# Altium PCB Battery_Module.PcbDoc
Units mm, origin at the board's own origin, x right, y up, seen from the top; angles counter-clockwise.
Board outline 80.25 x 40 mm, 2 copper layers (Top Layer, Bottom Layer); 27 components, 15 nets, 103 pads, 93 vias.
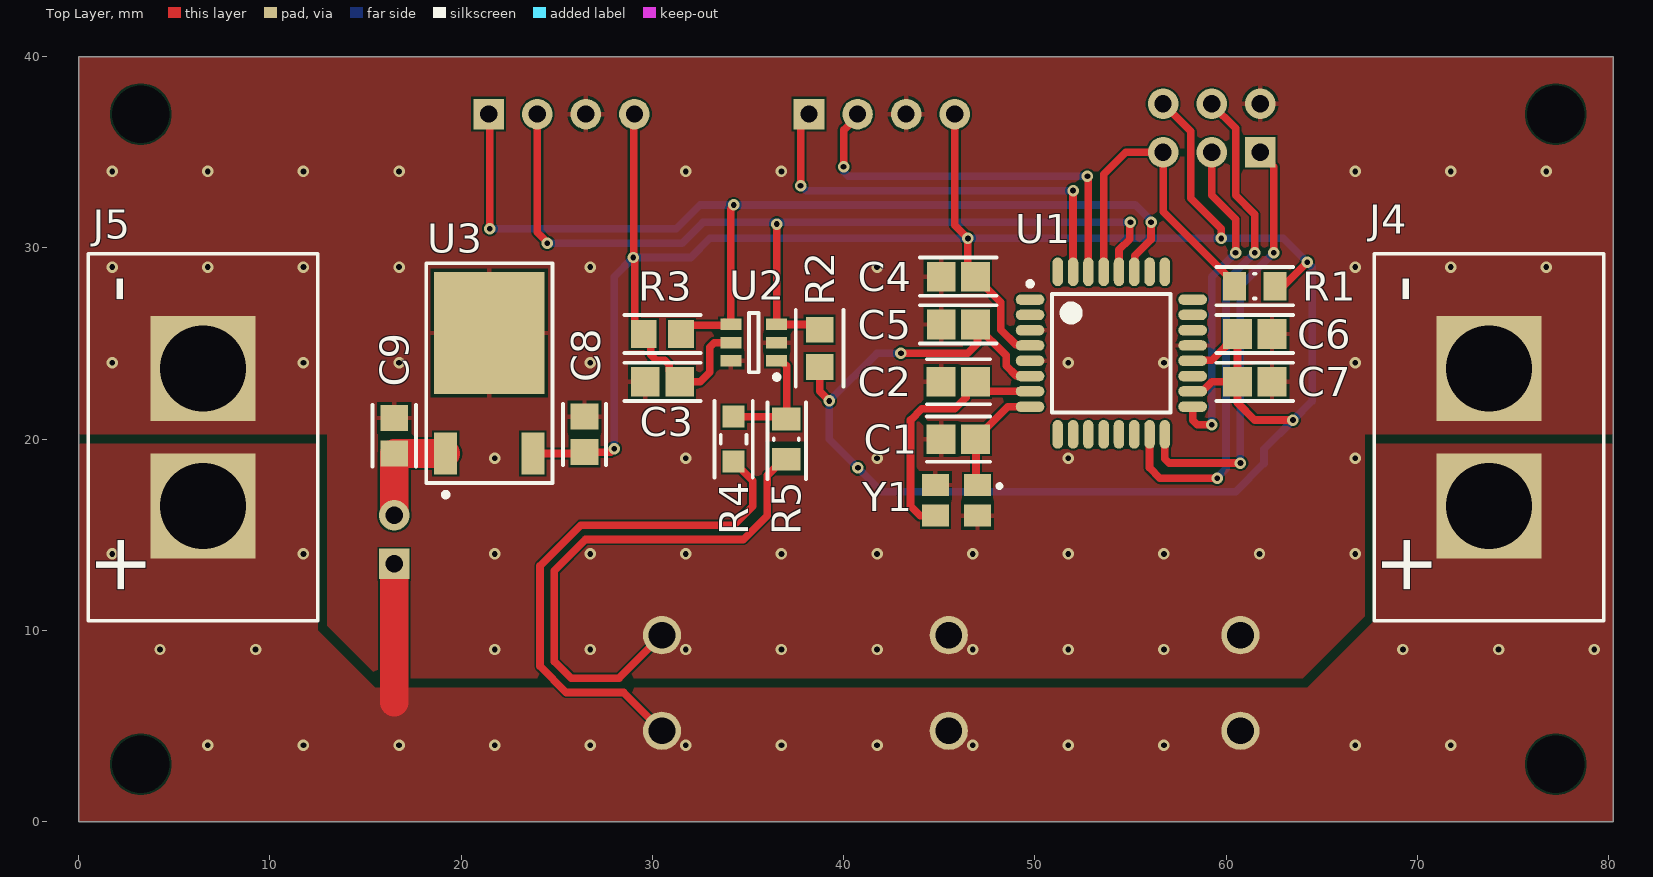
[diagram p0: Top Layer view]
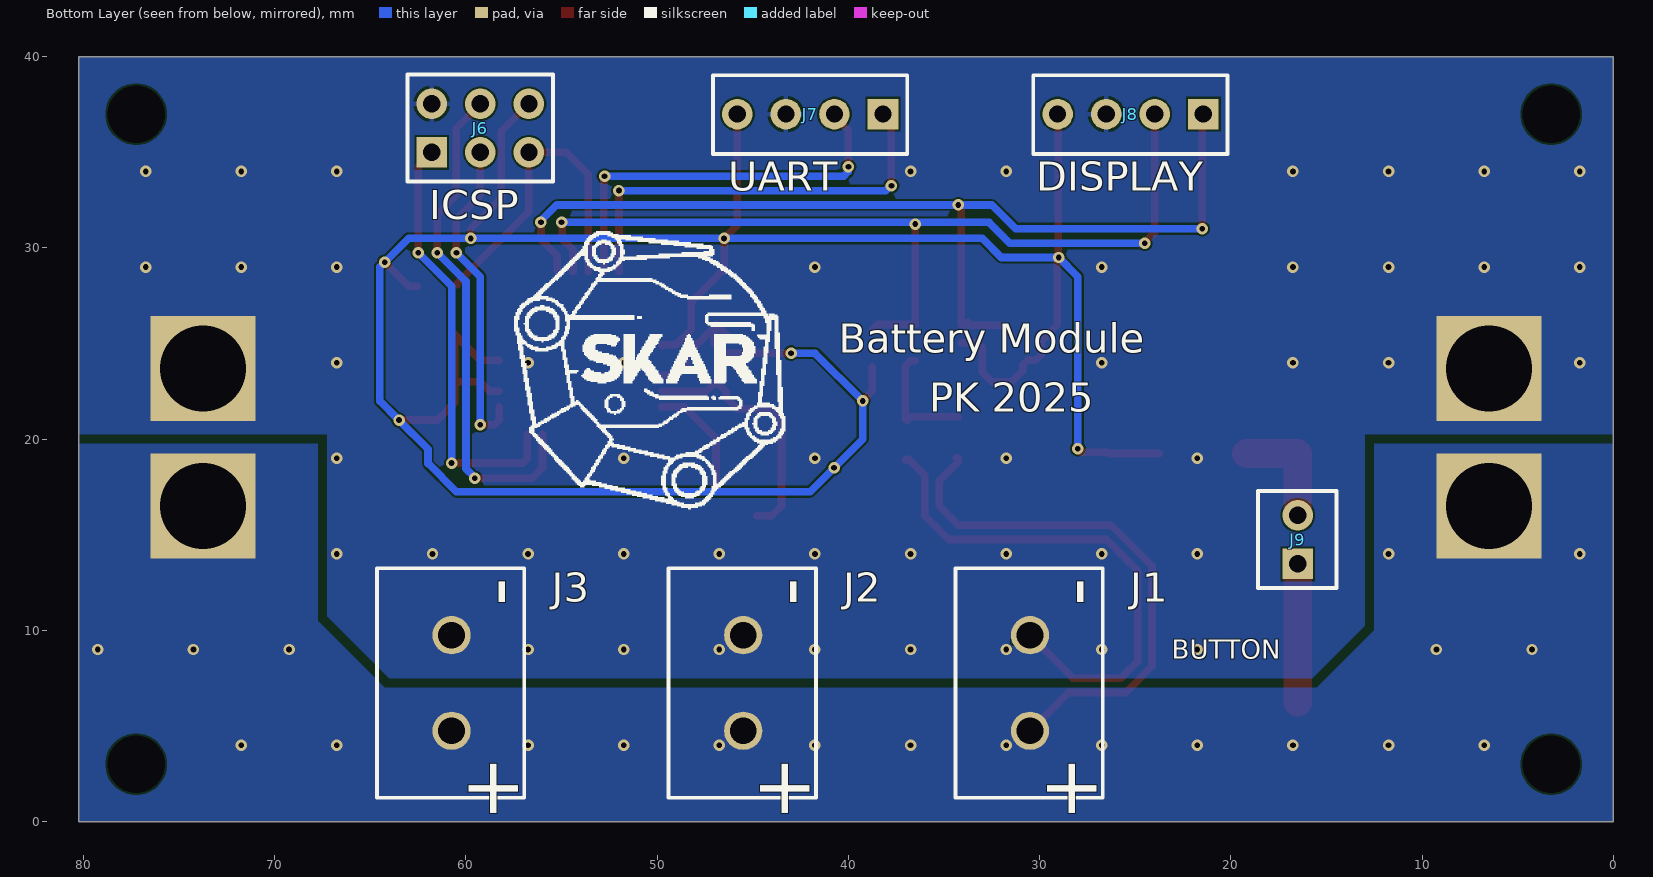
[diagram p1: Bottom Layer view, seen from below]

## Layer stack, top to bottom
Top Solder: solder mask 0.0102, Solder Resist, Dk 3.5
Top Layer: signal copper 0.0356
Dielectric 1: dielectric 0.32, FR-4, Dk 4.8
Bottom Layer: signal copper 0.0356
Bottom Solder: solder mask 0.0102, Solder Resist, Dk 3.5

## Board outline
0,0 80.25,0 80.25,40 0,40

## Design rules (kind name [scope] priority, off if disabled: settings)
Clearance Clearance_1 [All] p1: gap=0.1 ignorepadtopadclearanceinfootprint=TRUE
Clearance [All] p2: gap=0.1 ignorepadtopadclearanceinfootprint=TRUE
HoleSize [All] p1: absolutevalues=TRUE maxlimit=5 minlimit=0.025 maxpercent=80.000 minpercent=20.000
MinimumSolderMaskSliver [All] p1: minsoldermaskwidth=0.04
PolygonConnect PolygonConnectPWR [All vs HasFootprint('XT60_FEMALE_PANEL') OR HasFootprint('Phoenix')] p1: connectstyle=Direct reliefconductorwidth=0.254 reliefentries=4 polygonreliefangle="90 Angle" airgapwidth=0.254
PolygonConnect [All] p2: thpad.connectstyle=Relief thpad.reliefconductorwidth=0.254 thpad.reliefentries=4 thpad.polygonreliefangle="90 Angle" thpad.airgapwidth=0.15 smdpad.connectstyle=Relief smdpad.reliefconductorwidth=0.254 smdpad.reliefentries=4 smdpad.polygonreliefangle="90 Angle" smdpad.airgapwidth=0.15 via.connectstyle=Direct via.reliefconductorwidth=0.254 via.reliefentries=4 via.polygonreliefangle="90 Angle" via.airgapwidth=0.15
RoutingVias [All] p1: holewidth=0.2 width=0.4 viastyle="Through Hole" minholewidth=0.2 minwidth=0.4 maxholewidth=0.711 maxwidth=1.27
SilkToSilkClearance [All] p1: silktosilkclearance=0
SilkToSolderMaskClearance [IsPad] p1: minsilkscreentomaskgap=0.015 clearancetoexposedcopper=TRUE
SolderMaskExpansion [All] p1: expansion=0.04 istentingtop=FALSE
SupplyNets "Schematic Supply Nets_2" [InNet('VIN')] p1: voltage=0.000
SupplyNets "Schematic Supply Nets_1" [InNet('+5V')] p2: voltage=0.000
SupplyNets "Schematic Supply Nets" [InNet('GND')] p3: voltage=0.000
Width Width_1 [All] p1: maxlimit=3 minlimit=0.254 preferedwidth=0.4
Width [All] p2: maxlimit=0.625 minlimit=0.254 preferedwidth=0.4 minimp=50.000000 maximp=50.000000 favimp=50.000000
26 further rules are at their usual default settings.

## Components (designator, comment, footprint, x,y, rotation, side; value= is the part's Value field where it differs from the comment)
C1 "16pF" FP-C0805C-DN-IPC_A 46,20 r0 top value="16 pF"
C2 "16pF" FP-C0805C-DN-IPC_A 46,23 r0 top value="16 pF"
C3 "100nF" CAPC2013X140X50ML20T25 30.525,23 r0 top
C4 "100nF" CAPC2013X140X50ML20T25 46,28.5 r180 top
C5 "100nF" CAPC2013X140X50ML20T25 46,26 r180 top
C6 "100nF" CAPC2013X140X50ML20T25 61.5,25.5 r0 top
C7 "100nF" CAPC2013X140X50ML20T25 61.5,23 r0 top
C8 "10uF" FP-GRM21B-0_1-IPC_A 26.45,20.25 r90 top
C9 "10uF" FP-GRM21B-0_1-IPC_A 16.5,20.177 r90 top
J1 "Phoenix" Phoenix 30.5,4.75 r270 bottom
J2 "Phoenix" Phoenix 45.5,4.75 r270 bottom
J3 "Phoenix" Phoenix 60.75,4.75 r270 bottom
J4 "XT60" XT60_FEMALE_PANEL 73.75,16.5 r90 top
J5 "XT60" XT60_FEMALE_PANEL 6.5,16.5 r90 top
J6 "ICSP" "HEADER2X3 - DUPLICATE" 59.25,36.27 r90 bottom
J7 "UART" HEADER1X4 42,37 r270 bottom
J8 "DISPLAY" HEADER1X4 25.25,37 r270 bottom
J9 "BUTTON" HEADER1X2 16.5,14.75 r0 bottom
R1 "Resistor 10k +/-1% 0805 125 mW" RESC2013X50X35ML15T15 61.5,28 r0 top value=10k
R2 "Resistor 4k7 +/-1% 0805 125 mW" RESC2013X70X40ML20T20 38.75,24.75 r270 top value=4.7k
R3 "Resistor 4k7 +/-1% 0805 125 mW" RESC2013X70X40ML20T20 30.525,25.5 r180 top value=4.7k
R4 "150k" FP-ERA6A-MFG 34.25,20 r270 top
R5 "Resistor 10k +/-1% 0805 125 mW" RESC2013X50X35ML15T15 37,20 r270 top value=10k
U1 "ATMEGA328P-AU" ATMEGA328P-AU 54,24.5 r0 top
U2 "ADS1110A0IDBVT" TI-DBV6_N 35.3,25.05 r180 top
U3 "TLE7274-2D" TO228P998X235-3N-2-V 21.47,22.4 r90 top
Y1 "16MHz" WE-XTAL_CFPX-180 45.9,16.8 r180 top

## Footprints (in the part's own frame and the unit in brackets; to place one, negate y for a bottom-side part, rotate by r counter-clockwise, add the part's x,y. Pads: shape width x height; smd on the part's side, far side on the other; paste and mask are expansions set on the pad)
ATMEGA328P-AU [mm] "TQFP, 32-Leads, Body 7,00x7,00mm, Pitch 0,80mm, IPC Medium Density"
  oval 1.5x0.55 smd: 1(-4.25,2.8) 2(-4.25,2) 3(-4.25,1.2) 4(-4.25,0.4) 5(-4.25,-0.4) 6(-4.25,-1.2) 7(-4.25,-2) 8(-4.25,-2.8) 17(4.25,-2.8) 18(4.25,-2) 19(4.25,-1.2) 20(4.25,-0.4) 21(4.25,0.4) 22(4.25,1.2) 23(4.25,2) 24(4.25,2.8)
  oval 0.55x1.5 smd: 9(-2.8,-4.25) 10(-2,-4.25) 11(-1.2,-4.25) 12(-0.4,-4.25) 13(0.4,-4.25) 14(1.2,-4.25) 15(2,-4.25) 16(2.8,-4.25) 25(2.8,4.25) 26(2,4.25) 27(1.2,4.25) 28(0.4,4.25) 29(-0.4,4.25) 30(-1.2,4.25) 31(-2,4.25) 32(-2.8,4.25)
  silkscreen extent -4.37,-3.1 3.1,3.75, body extent -4.5,-4.5 4.5,4.5, height 1.2
CAPC2013X140X50ML20T25 [mm] "Chip Capacitor, 2-Leads, Body 2.00x1.25mm, IPC Low Density"
  rect 1.5x1.55 smd: 1(-0.9,0) 2(0.9,0)
  body extent -1.1,-0.72 1.1,0.72, height 1.4
FP-C0805C-DN-IPC_A [mm]
  rect 1.505x1.556 smd paste+0 mask+0: 1(-0.901,0) 2(0.901,0)
  silkscreen extent -1.65,-1.18 1.65,1.18, body extent -2.15,-1.28 2.15,1.28, height 0.25
FP-ERA6A-MFG [mm]
  rect 1.15x1.15 smd paste+0 mask+0: 1(-1.175,0) 2(1.175,0)
  silkscreen extent -0.23,-0.67 0.23,0.67, body extent -1.85,-0.77 1.85,0.77, height 0.25
FP-GRM21B-0_1-IPC_A [mm]
  rect 1.358x1.462 smd paste+0 mask+0: 1(-0.927,0) 2(0.927,0)
  silkscreen extent -1.61,-1.13 1.61,1.13, body extent -2.11,-1.23 2.11,1.23, height 0.25
HEADER1X2 [mm]
  rect 1.6x1.6 hole 0.9: 1(0,1.27)
  round 1.6 hole 0.9: 2(0,-1.27)
  silkscreen extent -2.03,-2.54 2.08,2.54, body extent -1.27,-2.54 1.27,2.54, height 9.5
HEADER1X4 [mm]
  rect 1.6x1.6 hole 0.9: 1(0,3.81)
  round 1.6 hole 0.9: 2(0,1.27) 3(0,-1.27) 4(0,-3.81)
  silkscreen extent -2.03,-5.08 2.08,5.08, body extent -1.27,-5.08 1.27,5.08, height 9.5
"HEADER2X3 - DUPLICATE" [mm]
  rect 1.6x1.6 hole 0.9: 1(-1.27,2.54)
  round 1.6 hole 0.9: 2(-1.27,0) 3(-1.27,-2.54) 4(1.27,-2.54) 5(1.27,0) 6(1.27,2.54)
  silkscreen extent -2.79,-3.81 2.79,3.81, body extent -2.54,-3.81 2.54,3.81, height 9.5
Phoenix [mm]
  round 2 hole 1.4 paste-2539.97: 1(0,0) 2(-5,0)
  silkscreen extent -8.5,-3.9 3.5,3.8, body extent -8.5,-3.87 3.5,4.7, height 12.1
RESC2013X50X35ML15T15 [mm] "Chip Resistor, 2-Leads, Body 2.2x1.4mm, IPC Low Density"
  rect 1.2x1.5 smd: 1(-1.05,0) 2(1.05,0)
  silkscreen extent -0.05,-0.65 0.05,0.65, body extent -1.1,-0.7 1.1,0.7, height 0.5
RESC2013X70X40ML20T20 [mm] "Chip Resistor, 2-Leads, Body 2.2x1.35mm, IPC Low Density"
  rect 1.35x1.45 smd: 1(-0.975,0) 2(0.975,0)
  body extent -1.1,-0.67 1.1,0.67, height 0.7
TI-DBV6_N [mm] "SOT23, 6-Leads, Body 2.9x1.6mm, Pitch 0.95mm, IPC Medium Density"
  rect 1.1x0.6 smd: 1(-1.2,0.95) 2(-1.2,0) 3(-1.2,-0.95) 4(1.2,-0.95) 5(1.2,0) 6(1.2,0.95)
  silkscreen extent -1.33,-1.55 0.25,1.92, body extent -0.87,-1.52 0.87,1.53, height 1.45
TO228P998X235-3N-2-V [mm] "TO,2.28mm pitch;2 pin,9.98mm L X 6.12mm W X 2.35mm H body"
  rect 2.2x1.2 smd paste+0 mask+0: 1(-3.15,2.28) 3(-3.15,-2.28)
  rect 6.4x5.8 smd paste+0 mask+0: 2(3.15,0)
  silkscreen extent -5.42,-3.3 6.8,3.3, body extent -3.94,-3.25 6.04,3.25, height 2.36
WE-XTAL_CFPX-180 [mm] "Quartz Crystal, size CFPX-180, body 3.4x2.7mm"
  rect 1.4x1.15 smd: 1(-1.1,-0.8) 2(1.1,-0.8) 3(1.1,0.8) 4(-1.1,0.8)
  silkscreen extent -2.35,-0.85 -2.15,-0.65, body extent -1.7,-1.35 1.7,1.35, height 0.65
XT60_FEMALE_PANEL [mm]
  rect 5.5x5.5 hole 4.5 paste-2539.97: 1(0,0) 2(7.2,0)
  silkscreen extent -6,-6 13.2,6, body extent -13.45,-7.88 20.55,7.88, height 15.5

## Part data
C1 C2: library part CMP-03020-014624-1, "C0805C160J5GACTU / CAP CER 16PF 50V NP0 0805", Capacitance="16 pF", Manufacturer=KEMET, Manufacturer Part Number=C0805C160J5GACTU, Package=C0805C-DN, Temperature="-55°C to +125°C", Temperature Characteristic=C0G, Temperature Coefficient=30ppm/°C, Temperature Range High=+125°C, Temperature Range Low=-55°C, Tolerance=0.05, Voltage Rating="50 V", Automotive=No, Category=Cap, ComponentLink2Description=Datasheet, ComponentLink2URL=https://content.kemet.com/datasheets/KEM_C1003_C0G_SMD.pdf, Device Class L1="Passive Components", Device Class L2=Capacitors, Device Class L3="Ceramic Capacitors", Digikey Description="CAP CER 16PF 50V NP0 0805", Height=0.88mm, Ipc Land Pattern Name=CAPC200125X78, Lead Free=Yes, Material=Ceramic, Mouser Description="Capacitor, Ceramic, 16Pf, 50Vdc, 5-% Tol, 5+% Tol, C0g-Tc Code, -30, 30Ppm-Tc Rohs Compliant: Yes", Octopart=https://octopart.com/c0805c160j5gactu-kemet-11800741, RoHS=TRUE
C3 C4 C5 C6 C7: library part CMP-2007-04784-1, Manufacturer="AVX Interconnect / Elco", Part Number=08055F104KAT2A
C8 C9: library part CMP-2007-03462-2, "Chip Multilayer Ceramic Capacitors for General Purpose, 0805, 10uF, X6S, 22%, 10%, 10V", Case Code (Imperial)=0805, Case Code (Metric)=2012, Dielectric=X6S, Max Operating Temperature=105°C, Min Operating Temperature=-55°C, Package Quantity=3000, Tolerance=10%, Voltage=10V, Capacitance=10uF, Case/Package=0805, Depth=1.25mm, Height=1.25mm, Lead Free="Lead Free", Length=2mm, Material=Ceramic, Mount="Surface Mount", Packaging="Tape and Reel", Radiation Hardening=No, REACH SVHC="No SVHC", Termination=SMD/SMT, Thickness=0.053inch, Voltage Rating=10V, Voltage Rating (DC)=10V, Width=1.25mm
J1 J2 J3 J4 J5 J9: library part Connector_2
J6: library part "Header 2x3"
J8: library part "IIC for Display"
R1 R5: library part CMP-009-00018-5, "Chip Resistor, 10 KOhm, +/- 1%, 125 mW, -55 to 155 degC, 0805 (2012 Metric)", Case/Package=0805, Max Operating Temperature=155°C, Min Operating Temperature=-55°C, Power=125mW, Tolerance=1%, Voltage Rating=150V, Mounting Technology=SM, Pins=2, RoHS Compliant=True
R2 R3: library part CMP-009-00032-5, "Chip Resistor, 4.7 KOhm, +/- 1%, 0.125 W, -55 to 155 degC, 0805 (2012 Metric)", Case/Package=0805, Max Operating Temperature=155°C, Min Operating Temperature=-55°C, Power=125mW, Tolerance=1%, Voltage Rating=150V, Mounting Technology=SM, Pins=2, RoHS Compliant=True
R4: library part CMP-2001-00599-2, "ERA-6AEB154V / RES 150K OHM 0.1% 1/8W 0805", Case Code (Imperial)=0805, Case Code (Metric)=2012, Max Operating Temperature=155°C, Max Power Dissipation=125mW, Min Operating Temperature=-55°C, Package Quantity=5000, Resistance=150kR, Resistance Tolerance=0.1%, Resistor Type="Thin Film", Temperature Coefficient=25ppm/°C, Voltage Rating=100V, Case/Package=0805, Construction=Rectangular, Contact Plating=Tin, Depth=1.25mm, Height=0.5mm, Lead Free="Lead Free", Length=2mm, Military Standard=Not, Mount="Surface Mount", Number of Pins=2, Number of Terminations=2, Packaging="Tape and Reel", Power Rating=125mW, Radiation Hardening=No, REACH SVHC="No SVHC", RoHS Compliant=Yes, Series=ERA-6A, Technology="METAL FILM", Termination=SMD/SMT, Tolerance=0.1%, Voltage Rating (DC)=100V, Width=1.25mm
U1: "8-bit Microcontrollers - MCU 32KB In-system Flash 20MHz 1.8V-5.5V"
U2: library part CMP-0003-00281-2, "16-Bit Delta-Sigma ADC with Internal Reference, PGA and Oscillator, I2C Serial Interface, -40 to 85 degC, 6-pin SOT23 (DBV6), Green (RoHS & no Sb/Br)", Analog Voltage AV/DD(Max)(V)=5.5, Analog Voltage AV/DD(Min)(V)=2.7, Manufacturer="Texas Instruments", # Input Channels=1, Architecture=Delta-Sigma, Code_JEDEC=MO-178, ComponentLink1Description="Manufacturer URL", ComponentLink1URL=http://www.ti.com/, ComponentLink2Description=Datasheet, ComponentLink2URL=http://www.ti.com/general/docs/lit/getliterature.tsp?genericPartNumber=ADS1110&fileType=pdf, ComponentLink3Description="Package Specification", ComponentLink3URL=http://www.ti.com/litv/pdf/mpds026h, DatasheetVersion=SBAS276A, Digital Supply(Max)(V)=5.5, Digital Supply(Min)(V)=2.7, Eco-Plan="Green (RoHS & no Sb/Br)", Interface="Serial I2C", Mounting Technology="Surface Mount", PackageDescription="6-Pin Plastic Small Outline, Body 1.6 x 2.9 mm, Pitch 0.95 mm", PackageReference=DBV6, PackageVersion="4073253-5/K, 03/2006", PartNumber=ADS1110A0IDBVT, Resolution(Bits)=16, Sample Rate (max)(SPS)=240, SubFamily="Precision ADC (<=10MSPS)"
Y1: library part CMP-03913-116876453-1, "830035264 WE-XTAL Quartz Crystal", Max Operating Temperature=60°C, Min Operating Temperature=-10°C, Frequency=16MHz, Height=800µm, Length=3.2mm, NexarPartId=116876453, Width=2.5mm

## Free pads (board coordinates)
  round 0 hole 3 paste-2539.97: 6(3.25,3) 6(3.25,37) 6(77.25,3) 6(77.25,37)

## Via types
v1: diameter 0.6, hole 0.3, Top Layer to Bottom Layer, tented both sides, 93 vias

## Nets (pads, with @x,y where several pads share a name; then routed paths per layer and width w, separated by ;. In a path a pad name is that pad's centre, name@x,y a point inside that pad or via, vN(x,y) a via of type N, cw(c..) or ccw(c..) an arc to the next point about the centre after c; other vN are vias at no path point)
+5V: C3.2 C4.1 C5.1 C6.1 C7.1 C8.1 J6.4 J7.4 J8.4 R1.2 R2.2 R3.2 U1.4 U1.6 U1.18 U1.20 U2.5 U3.3 | length 162.6
  Top Layer w0.4: U3.3 26.377,19.25 C8.1 27.823,19.323 v1(28,19.5) ; J8.4 29.03,36.97 29.03,29.53 v1(29,29.5) 29,29.446 29.075,29.371 29.075,25.975 R3.2 29.918,25.132 29.918,24.419 30.212,24.125 30.641,24.125 30.875,23.891 30.875,23.575 C3.2@31.45,23 ; C3.2@31.5,22.95 C3.2@31.45,23 ; U2.5 33.234,25.05 33,24.816 33,23.5 32.5,23 C3.2@31.45,23 ; R2.2 38.75,22.5 v1(39.25,22) ; v1(43,24.5) 46.5,24.5 47,25 C5.1@47,25.875 ; J7.4 45.81,31.19 v1(46.5,30.5) 46.5,28.9 C4.1 ; C5.1@46.35,25.45 C5.1 47,25.9 C5.1@47,25.875 ; C4.1@46.888,28.487 48.212,27.163 48.212,25.733 49.015,24.929 49.721,24.929 U1.4 ; U1.6 49.721,23.329 49.015,23.329 48.5,23.844 48.5,24.375 C5.1@47,25.875 ; J6.4 58.15,36.1 58.15,32.6 59.75,31 v1(59.75,30.5) ; U1.18 58.766,22.5 59.266,23 C7.1 ; U1.20 58.279,24.129 59.254,24.129 60.6,25.475 C7.1 ; R1.2 63,28 v1(64.25,29.25) ; v1(63.5,21) 61.5,21 60.6,21.9 C7.1
  Bottom Layer w0.4: v1(28,19.5) 28,28.5 v1(29,29.5) 32,29.5 33,30.5 v1(46.5,30.5) v1(59.75,30.5) 63,30.5 64.5,29 64.5,27.5 64.5,22 v1(63.5,21) 61.981,19.481 61.981,18.731 60.5,17.25 42,17.25 v1(40.75,18.5) 39.25,20 v1(39.25,22) 41.75,24.5 v1(43,24.5)
GND: C1.1 C2.1 C3.1 C4.2 C5.2 C6.2 C7.2 C8.2 C9.2 J1.2 J2.2 J3.2 J4.2 J5.2 J6.6 J7.3 J8.3 R5.2 U1.3 U1.5 U1.21 U2.2 U2.6 U3.2 Y1.2 Y1.4 | length 28.5
  Top Layer w0.4: J1.2 28.25,7.5 25.75,7.5 24.875,8.375 24.875,13.125 26.5,14.75 34.75,14.75 36,16 36,18.1 36.85,18.95 R5.2 ; R5.2@37,18.9 R5.2@37.025,18.925
  Bottom Layer w0.254: J1.2 31,9.75 31,9.722 31.307,9.416 J1.2@31.334,9.416
  other v1: 21.75,9 26.75,9 31.75,9 36.75,9 41.75,9 46.75,9 51.75,9 56.75,9 21.75,14 26.75,14 31.75,14 36.75,14 41.75,14 46.75,14 51.75,14 56.75,14 61.75,14 66.75,14 21.75,19 31.75,19 41.75,19 51.75,19 66.75,19 1.75,24 11.75,24 16.75,24 26.75,24 51.75,24 56.75,24 66.75,24 1.75,29 6.75,29 11.75,29 16.75,29 26.75,29 41.75,29 66.75,29 71.75,29 76.75,29 1.75,34 6.75,34 11.75,34 16.75,34 31.75,34 36.75,34 66.75,34 71.75,34 76.75,34
MISO: J6.1 U1.16 | length 22.6
  Top Layer w0.4: U1.16 56.8,18.984 57.034,18.75 v1(60.75,18.75) ; J6.1@61.75,35 J6.1 62.39,34.4 62.39,34.36 62.5,34.25 v1(62.5,29.75)
  Bottom Layer w0.4: v1(60.75,18.75) 60.75,28 v1(62.5,29.75)
MOSI: J6.5 U1.15 | length 26.8
  Top Layer w0.4: U1.15 56,18.5 56.544,17.956 v1(59.544,17.956) ; J6.5@59.25,37.5 60.5,36.25 60.5,32.75 61.5,31.75 v1(61.5,29.75)
  Bottom Layer w0.4: v1(59.544,17.956) 59.544,18.01 60,18.467 60,28.25 v1(61.5,29.75)
NetC1_2: C1.2 U1.8 Y1.1 | length 6
  Top Layer w0.4: Y1.1 46.926,17.674 46.926,20 46.926,20.051 48.575,21.7 U1.8 U1.8@49.721,21.671
NetC2_2: C2.2 U1.7 Y1.3 | length 13.5
  Top Layer w0.4: Y1.3 44,16 43.5,16.5 43.5,21 44.088,21.588 45.81,21.588 46.398,22.176 46.398,22.473 46.926,23 47.426,22.5 U1.7
NetC9_1: C9.1 J9.2 U3.1 | length 5.9
  Top Layer w1.5: J9.2 C9.1 U3.1
NetR4_1: R4.1 R5.1 U2.1 | length 6.3
  Top Layer w0.4: R4.1 36.9,21.175 37.025,21.05 37.025,23.825 36.75,24.1 U2.1 ; R5.1@36.925,20.975 R5.1
RESET: J6.3 R1.1 U1.29 | length 17.2
  Top Layer w0.4: U1.29 53.6,33.85 54.75,35 J6.3 56.71,31.89 60.45,28.15 R1.1@60.45,28.074
RX: J7.2 U1.30 | length 20.9
  Top Layer w0.4: v1@40,34.29 40,36.166 40.73,36.896 J7.2 ; U1.30 v1@52.8,33.5
  Bottom Layer w0.4: v1(40,34.25) 40,34 40.25,33.75 v1(52.75,33.75)
SCK: J6.2 U1.17 | length 17.1
  Top Layer w0.4: U1.17 58.25,21 58.5,20.75 v1(59.25,20.75) ; J6.2 59.25,32.75 60.5,31.5 v1(60.5,29.75)
  Bottom Layer w0.4: v1(59.25,20.75) 59.25,28.5 v1(60.5,29.75)
SCL: J8.2 R2.1 U1.28 U2.3 | length 48.4
  Top Layer w0.4: J8.2 23.98,30.824 24.5,30.304 v1(24.5,30.25) ; v1(36.5,31.25) U2.3 38.475,26 R2.1 ; U1.28 54.4,29.9 54.962,30.462 54.962,31.312 v1(55,31.35)
  Bottom Layer w0.4: v1(24.5,30.25) 31.55,30.25 32.65,31.35 v1(55,31.35)
SDA: J8.1 R3.1 U1.27 U2.4 | length 53.6
  Top Layer w0.4: J8.1 21.5,36.94 v1(21.5,31) ; R3.1 31.95,25.95 U2.4@33.925,25.95 ; U2.4@33.75,26.1 33.85,26 U2.4 34.1,32.046 34.25,32.196 v1(34.25,32.25) ; U1.27 55.229,28.779 55.229,29.596 56.077,30.445 v1(56.077,31.35)
  Bottom Layer w0.4: v1(21.5,31) 31.25,31 32.5,32.25 v1(34.25,32.25) 55.25,32.25 v1@56,31.5
TX: J7.1 U1.31 | length 22.5
  Top Layer w0.4: v1(37.75,33.25) 37.75,36.56 J7.1 ; U1.31 v1(52,33)
  Bottom Layer w0.4: v1(37.75,33.25) 37.804,33.25 38.054,33 v1(52,33)
VIN: J1.1 J2.1 J3.1 J4.1 J5.1 J9.1 R4.2 | length 36.1
  Top Layer w0.4: J1.1 28.5,6.75 25.5,6.75 24.125,8.125 24.125,13.375 26.25,15.5 34.25,15.5 35.25,16.5 35.25,17.825 R4.2 34.25,19.025 R4.2@34.35,19.025
  Top Layer w1.5: 16.5,6.25 J9.1
  Bottom Layer w0.4: J1.1@30.25,4.5 J1.1
  other v1: 6.75,4 11.75,4 16.75,4 21.75,4 26.75,4 31.75,4 36.75,4 41.75,4 46.75,4 51.75,4 56.75,4 66.75,4 71.75,4 4.25,9 9.25,9 69.25,9 74.25,9 79.25,9 1.75,14 11.75,14
pads on no net: U1.1 U1.2 U1.9 U1.10 U1.11 U1.12 U1.13 U1.14 U1.19 U1.22 U1.23 U1.24 U1.25 U1.26 U1.32

## Polygon pours and split planes (outlines as drawn)
GND on Top Layer "GND_L01_P003" (solid, pour order 3): 0,20.25 13,20.25 13,10.25 15.75,7.5 64,7.5 67.25,10.75 67.25,20.25 80.25,20.25 80.25,40 0,40
VIN on Top Layer "VIN_L01_P005" (solid, pour order 5): 0,19.75 12.5,19.75 12.5,10 15.5,7 64.25,7 67.75,10.5 67.75,19.75 80.25,19.75 80.25,0 0,0
VIN on Top Layer "NONET_L01_P-001" (solid, pour order 1): 14.643,7 18.143,7 18.143,4.75 14.643,4.75
GND on Bottom Layer "GND_L02_P004" (solid, pour order 4): 0,20.25 0,40 80.25,40 80.25,20.25 67.25,20.25 67.25,10.75 64,7.5 15.75,7.5 13,10.25 13,20.25
VIN on Bottom Layer "VIN_L02_P002" (solid, pour order 2): 0,19.75 12.5,19.75 12.5,10 15.5,7 64.25,7 67.75,10.5 67.75,19.75 80.25,19.75 80.25,0 0,0

## Other copper
Top Layer:
  pour cut-out: 35.9,19.9 35.9,18.1 38,18.1 38,19.9

## Silkscreen, mask and mechanical layers (free items; w line width, h text height)
Top Overlay:
  lines w0.2: 28.525,22 32.525,22 ; 28.525,24 32.525,24 ; 28.525,24.5 32.525,24.5 ; 28.525,26.5 32.525,26.5 ; 33.25,18 33.25,22 ; 35.25,18 35.25,22 ; 36.025,17.925 36.025,21.925 ; 37.5,22.75 37.5,26.75 ; 38.025,17.925 38.025,21.925 ; 40,22.75 40,26.75 ; 44,25 48,25 ; 44,27 48,27 ; 44,27.5 48,27.5 ; 44,29.5 48,29.5 ; 59.5,22 63.5,22 ; 59.5,24 63.5,24 ; 59.5,24.5 63.5,24.5 ; 59.5,26.5 63.5,26.5 ; 59.5,27 63.5,27 ; 59.5,29 63.5,29
Bottom Overlay:
  drawing of 13 lines, arcs and shapes, not listed
  text "Battery Module" at 40.496,24.512 h1.52
  text "PK 2025" at 35.771,21.429 h1.52

## Text inside footprints (layer, text, board x,y; h text height)
J1: Bottom Overlay "-" at 29,12.75 h3 r90; Bottom Overlay "+" at 29.6,3.45 h3 r90
J2: Bottom Overlay "-" at 44,12.75 h3 r90; Bottom Overlay "+" at 44.6,3.45 h3 r90
J3: Bottom Overlay "+" at 59.85,3.45 h3 r90; Bottom Overlay "-" at 59.25,12.75 h3 r90
J4: Top Overlay "+" at 70.75,11.7 h3 r90; Top Overlay "-" at 70.55,27.1 h3 r90
J5: Top Overlay "-" at 3.3,27.1 h3 r90; Top Overlay "+" at 3.5,11.7 h3 r90